# Altium PCB 2_Lay_PCB.PcbDoc
Units mm, origin at the board's own origin, x right, y up, seen from the top; angles counter-clockwise.
Board outline 45 x 45 mm, 2 copper layers (Component Side, Bottom Layer), stack 0.325 mm thick; 2 components, 13 nets, 22 pads, 5 vias.
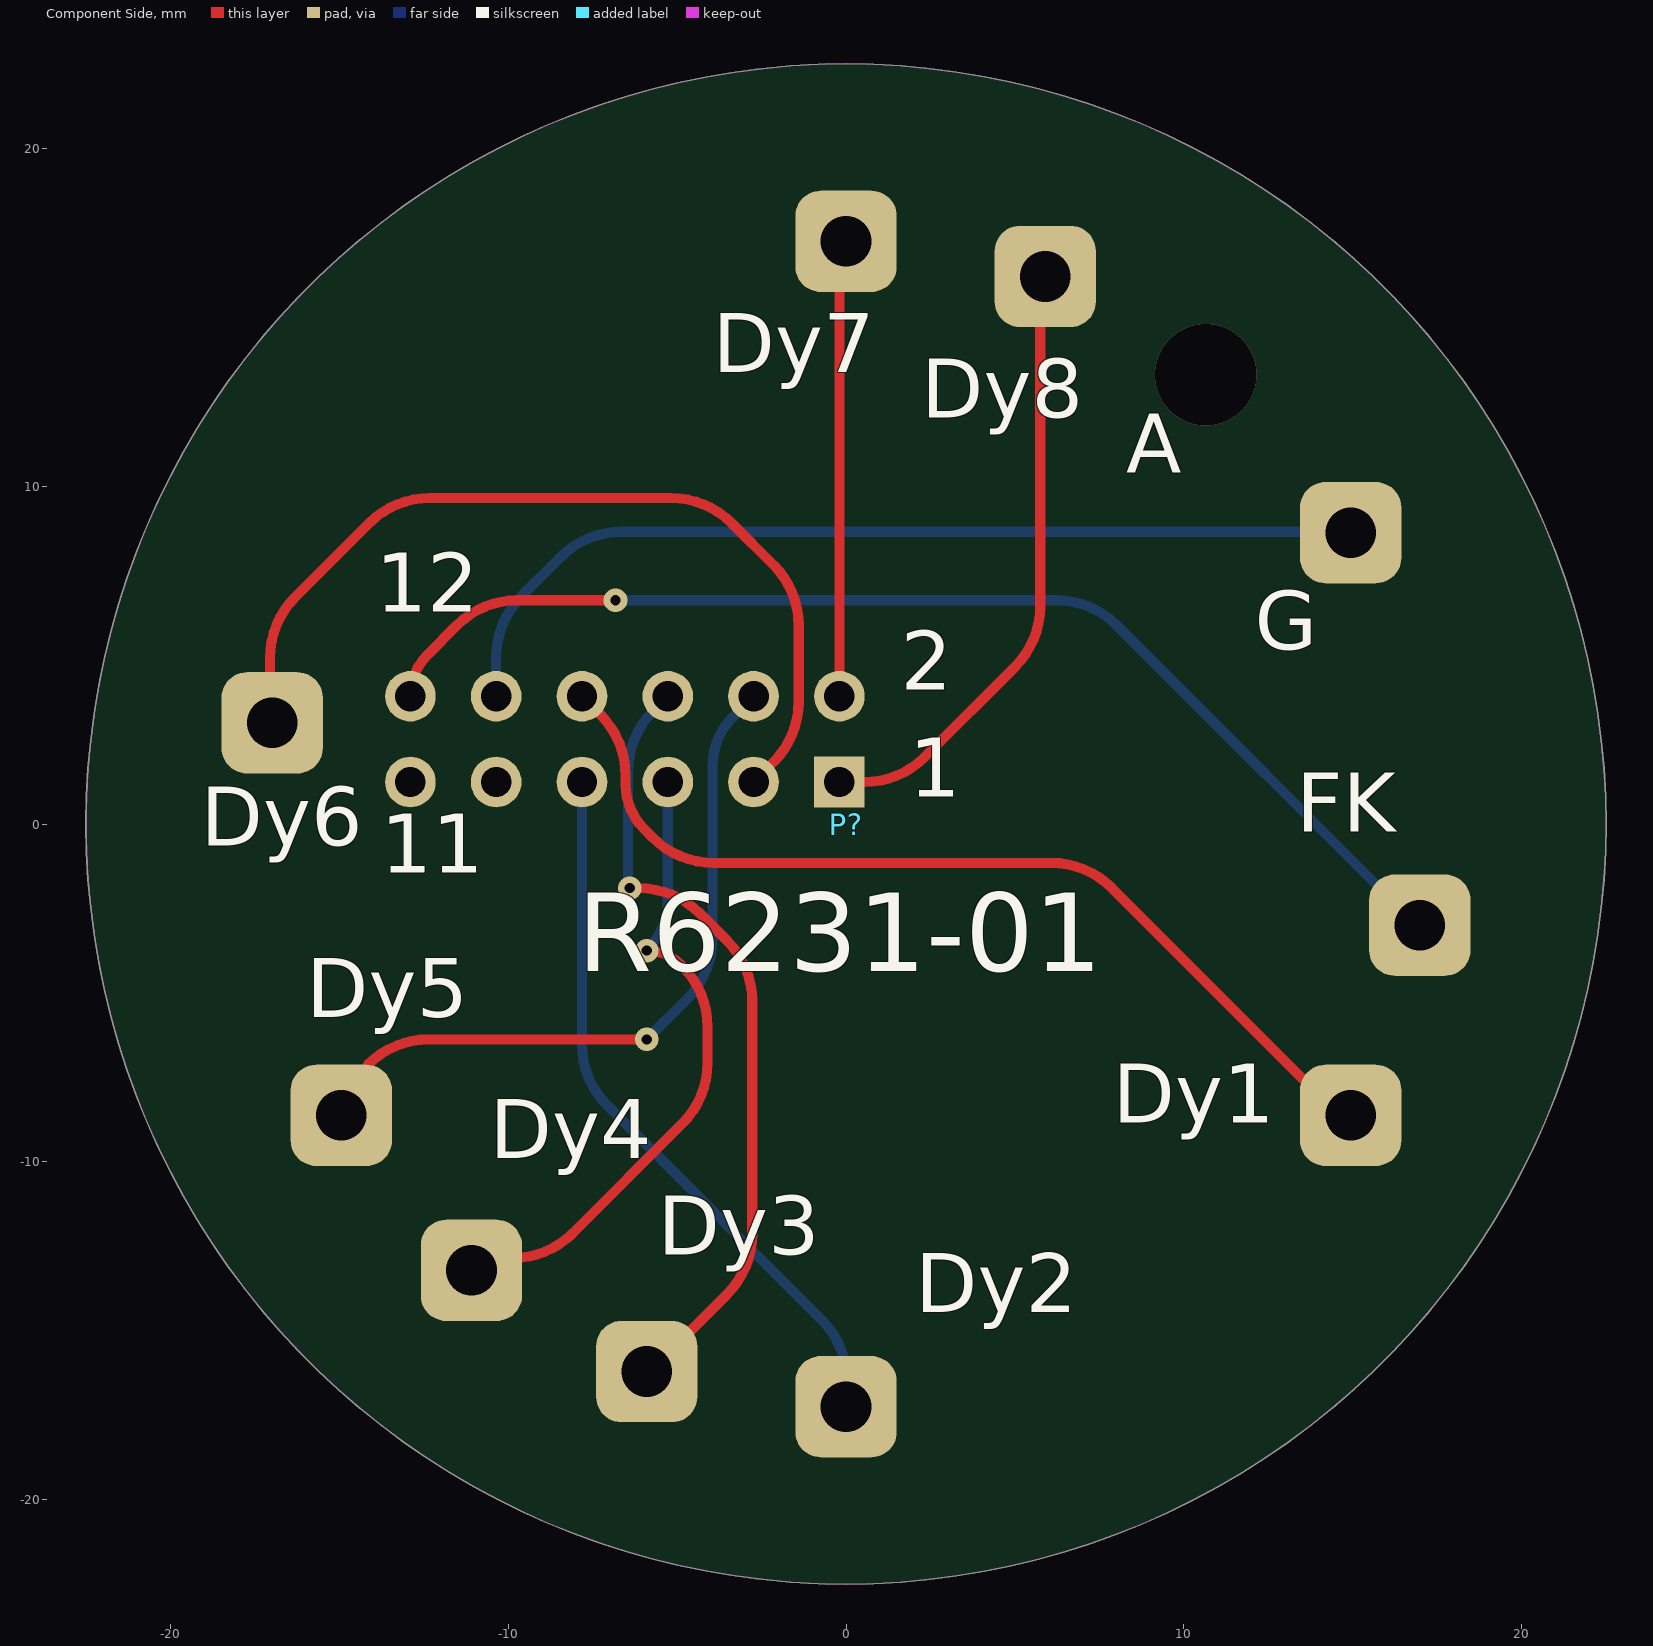
[diagram p0: Component Side view]
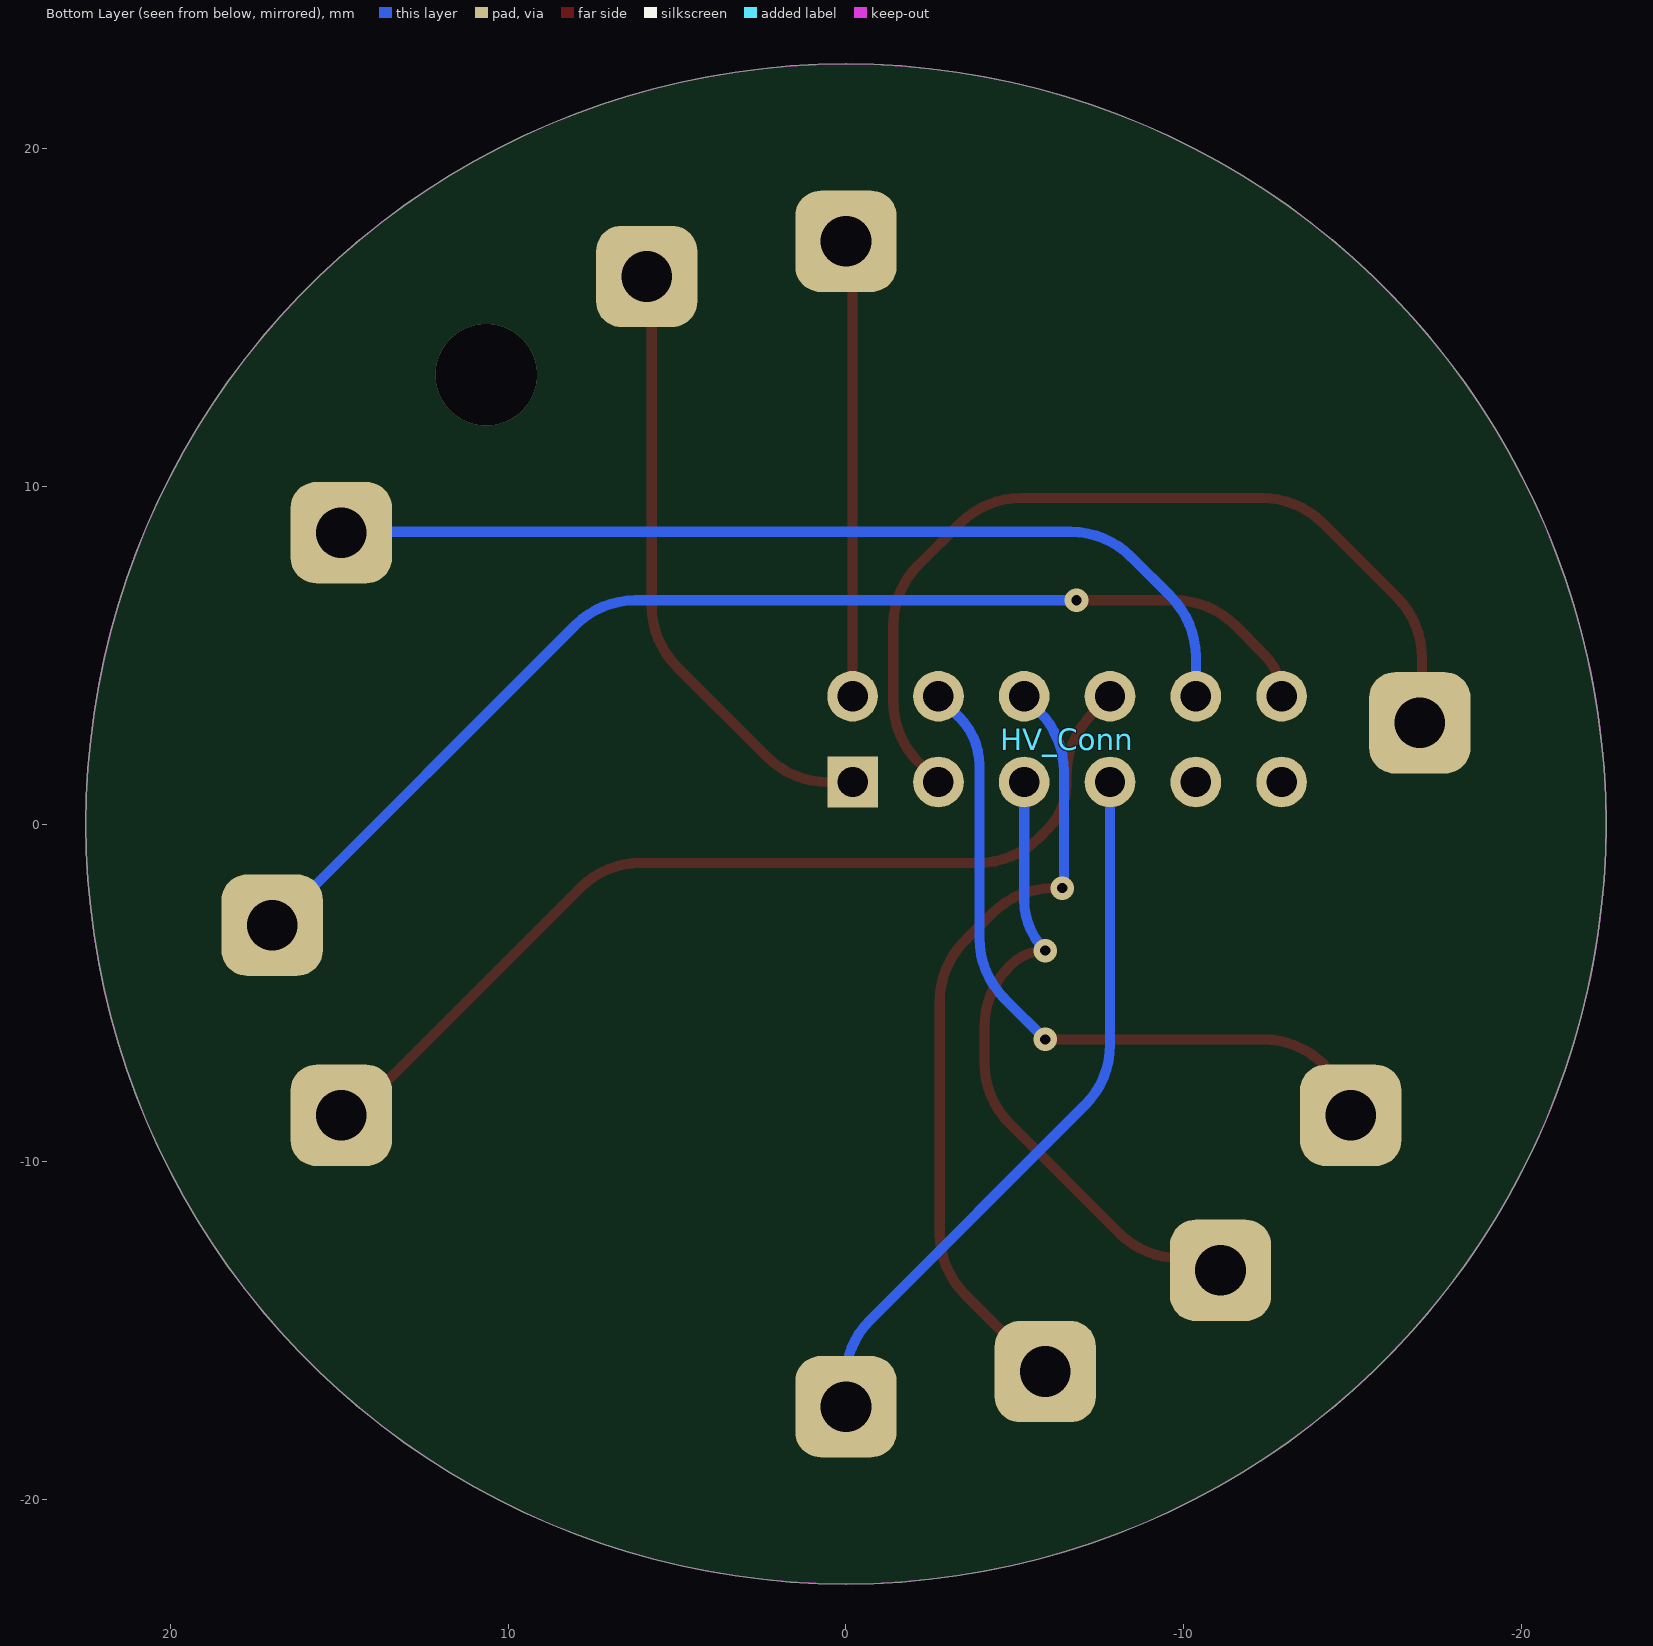
[diagram p1: Bottom Layer view, seen from below]

## Layer stack, top to bottom
Top Solder: solder mask 0.0102, Solder Resist, Dk 3.5
Component Side: signal copper 0.0356
Dielectric 1: core 0.254, FR-4, Dk 4.2
Bottom Layer: signal copper 0.0356
Solder Side: solder mask 0.0102, Solder Resist, Dk 3.5

## Board outline
0,-22.5 cw(c0,0) -22.5,0 cw(c0,0) 0,22.5 cw(c0,0) 22.5,0 cw(c0,0)

## Design rules (kind name [scope] priority, off if disabled: settings)
BoardOutlineClearance [All] p1: gap=0.381
Clearance [All] p1: gap=0.127
HoleSize [All] p1: absolutevalues=TRUE maxlimit=6.604 minlimit=0.254 maxpercent=80.000 minpercent=20.000
MinimumAnnularRing [All] p1: minimumring=0.102
PolygonConnect PolygonConnect_via [IsVia] p1: connectstyle=Direct reliefconductorwidth=0.254 reliefentries=4 polygonreliefangle="90 Angle" airgapwidth=0.254
PolygonConnect [All] p2: connectstyle=Relief reliefconductorwidth=0.254 reliefentries=4 polygonreliefangle="90 Angle" airgapwidth=0.254
RoutingTopology [InNet('No Net')] p1: topology=Shortest
RoutingVias [All] p1: holewidth=0.254 width=0.457 viastyle="Through Hole" minholewidth=0.254 minwidth=0.457 maxholewidth=2.54 maxwidth=2.54
SolderMaskExpansion [All] p1: expansion=0.064
Width [All] p1: maxlimit=2.54 minlimit=0.3 preferedwidth=0.3
28 further rules are at their usual default settings.

## Components (designator, comment, footprint, x,y, rotation, side; value= is the part's Value field where it differs from the comment)
HV_Conn "HV_Conn" HDR2X6H -0.196,1.242 r180 bottom locked
P? "Header 18" R6231-01 0,0 r270 top locked

## Footprints (in the part's own frame and the unit in brackets; to place one, negate y for a bottom-side part, rotate by r counter-clockwise, add the part's x,y. Pads: shape width x height; smd on the part's side, far side on the other; paste and mask are expansions set on the pad)
HDR2X6H [mm] "Connector; Header; 6x2 Position; Right Angle"
  rect 1.5x1.5 hole 0.9: 1(0,0)
  round 1.5 hole 0.9: 2(0,2.54) 3(2.54,0) 4(2.54,2.54) 5(5.08,0) 6(5.08,2.54) 7(7.62,0) 8(7.62,2.54) 9(10.16,0) 10(10.16,2.54) 11(12.7,0) 12(12.7,2.54)
R6231-01 [mm]
  rrect50% 3x3 hole 1.5: 1(8.625,14.939) 4(17.25,0) 5(16.21,-5.9) 6(13.214,-11.088) 7(8.625,-14.939) 9(-2.995,-16.988) 13(-17.25,0) 14(-16.21,5.9) 16(-8.625,14.939) 18(2.995,16.988)

## Part data
HV_Conn: library part "Header 6X2H", "Header, 6-Pin, Dual row, Right Angle"
P?: "Header, 18-Pin"

## Via types
v1: diameter 0.7, hole 0.3, Component Side to Bottom Layer, tented both sides, 4 vias
v2: diameter 3, hole 3, Component Side to Bottom Layer, 1 vias

## Nets (pads, with @x,y where several pads share a name; then routed paths per layer and width w, separated by ;. In a path a pad name is that pad's centre, name@x,y a point inside that pad or via, vN(x,y) a via of type N, cw(c..) or ccw(c..) an arc to the next point about the centre after c; other vN are vias at no path point)
ANODE: 
UP1: HV_Conn.1 P?.14 | length 18.8
  Component Side w0.3: HV_Conn.1 0.54,1.242 ccw(c0.54,3.782) 2.336,1.986 5.006,4.656 ccw(c3.21,6.452) 5.75,6.452 5.75,16.575 cw(c5.569,16.394) P?.14@5.825,16.394
UP2: HV_Conn.2 P?.13 | length 13.6
  Component Side w0.3: HV_Conn.2 -0.196,16.465 cw(c0.985,16.465) P?.13@0.15,17.3
UP3: HV_Conn.3 P?.9 | length 26.9
  Component Side w0.3: P?.9@-17.025,3.1 cw(c-16.965,3.16) -17.05,3.16 -17.05,4.923 cw(c-14.51,4.923) -16.306,6.719 -14.119,8.906 cw(c-12.323,7.11) -12.323,9.65 -5.177,9.65 cw(c-5.177,7.11) -3.381,8.906 -2.144,7.669 cw(c-3.94,5.873) -1.4,5.873 -1.4,3.63 cw(c-3.94,3.63) -2.144,1.834 HV_Conn.3
UP4: HV_Conn.4 P?.7 | length 19.7
  Component Side w0.3: -14.144,-7.119 cw(c-12.348,-8.915) -12.348,-6.375 v1(-5.9,-6.375)
  Bottom Layer w0.3: v1@-5.9,-6.4 v1(-5.9,-6.375) -4.694,-5.169 ccw(c-6.49,-3.373) -3.95,-3.373 -3.95,1.725 cw(c-1.915,1.725) -3.354,3.164 HV_Conn.4
UP5: HV_Conn.5 P?.6 | length 19.3
  Component Side w0.3: P?.6@-11.2,-12.85 -9.877,-12.85 ccw(c-9.877,-10.31) -8.081,-12.106 -4.844,-8.869 ccw(c-6.64,-7.073) -4.1,-7.073 -4.1,-6.002 ccw(c-6.64,-6.002) -4.844,-4.206 -4.876,-4.174 ccw(c-5.9,-5.199) v1(-5.9,-3.75)
  Bottom Layer w0.3: v1(-5.9,-3.75) ccw(c-7.406,-2.244) -5.276,-2.244 HV_Conn.5
UP6: HV_Conn.6 P?.5 | length 23.7
  Component Side w0.3: v1(-6.4,-1.9) -6.127,-1.9 cw(c-6.127,-4.44) -4.331,-2.644 -3.519,-3.456 cw(c-5.315,-5.252) -2.775,-5.252 -2.775,-12.123 cw(c-5.315,-12.123) -3.519,-13.919 P?.5@-5.875,-16.275
  Bottom Layer w0.3: v1(-6.4,-1.9) cw(c-6.279,-1.779) -6.45,-1.779 -6.45,1.556 cw(c-3.91,1.556) -5.706,3.352 HV_Conn.6
UP7: HV_Conn.7 P?.4 | length 21.9
  Bottom Layer w0.3: HV_Conn.7 -7.816,-6.532 ccw(c-5.276,-6.532) -7.072,-8.328 -0.719,-14.681 cw(c-2.515,-16.477) 0.025,-16.477 P?.4@0.025,-17.6
UP8: HV_Conn.8 P?.1 | length 28.3
  Component Side w0.3: HV_Conn.8 -7.269,3.235 cw(c-9.065,1.439) -6.525,1.439 -6.525,1.178 ccw(c-4.647,1.178) -5.975,-0.15 -5.719,-0.406 ccw(c-3.923,1.39) -3.923,-1.15 6.073,-1.15 cw(c6.073,-3.69) 7.869,-1.894 P?.1@14.55,-8.575
UP9: HV_Conn.9
UP10: HV_Conn.10 P?.16 | length 28.5
  Bottom Layer w0.3: HV_Conn.10 -10.356,4.942 cw(c-7.816,4.942) -9.612,6.738 -8.444,7.906 cw(c-6.648,6.11) -6.648,8.65 P?.16@15.1,8.65
UP11: HV_Conn.11
UP12: HV_Conn.12 P?.18 | length 35.1
  Component Side w0.3: HV_Conn.12 cw(c-11.153,3.782) -12.385,5.015 -11.519,5.881 cw(c-9.723,4.085) -9.723,6.625 v1(-6.825,6.625)
  Bottom Layer w0.3: v1(-6.825,6.625) 6.223,6.625 cw(c6.223,4.085) 8.019,5.881 P?.18@16.875,-2.975
copper on no net:
  other v2: 10.65,13.3

## Keep-outs
Keep-Out Layer:
  circle w0.01: c0,0 r22.5

## Silkscreen, mask and mechanical layers (free items; w line width, h text height)
Top Overlay:
  text "Dy7" at -3.95,12.8 h3
  text "Dy8" at 2.225,11.45 h3
  text "A" at 8.3,9.825 h3
  text "12" at -13.925,5.7 h3
  text "G" at 12.1,4.575 h3
  text "2" at 1.625,3.4 h3
  text "1" at 1.875,0.225 h3
  text "FK" at 13.325,-0.8 h3
  text "Dy6" at -19.1,-1.225 h3
  text "11" at -13.775,-2.025 h3
  text "R6231-01" at -7.95,-5.125 h4
  text "Dy5" at -15.975,-6.3 h3
  text "Dy1" at 7.9,-9.425 h3
  text "Dy4" at -10.55,-10.475 h3
  text "Dy3" at -5.575,-13.325 h3
  text "Dy2" at 2.05,-15.025 h3